# EAGLE board RX_Mini v43 (EAGLE 9.7.0)
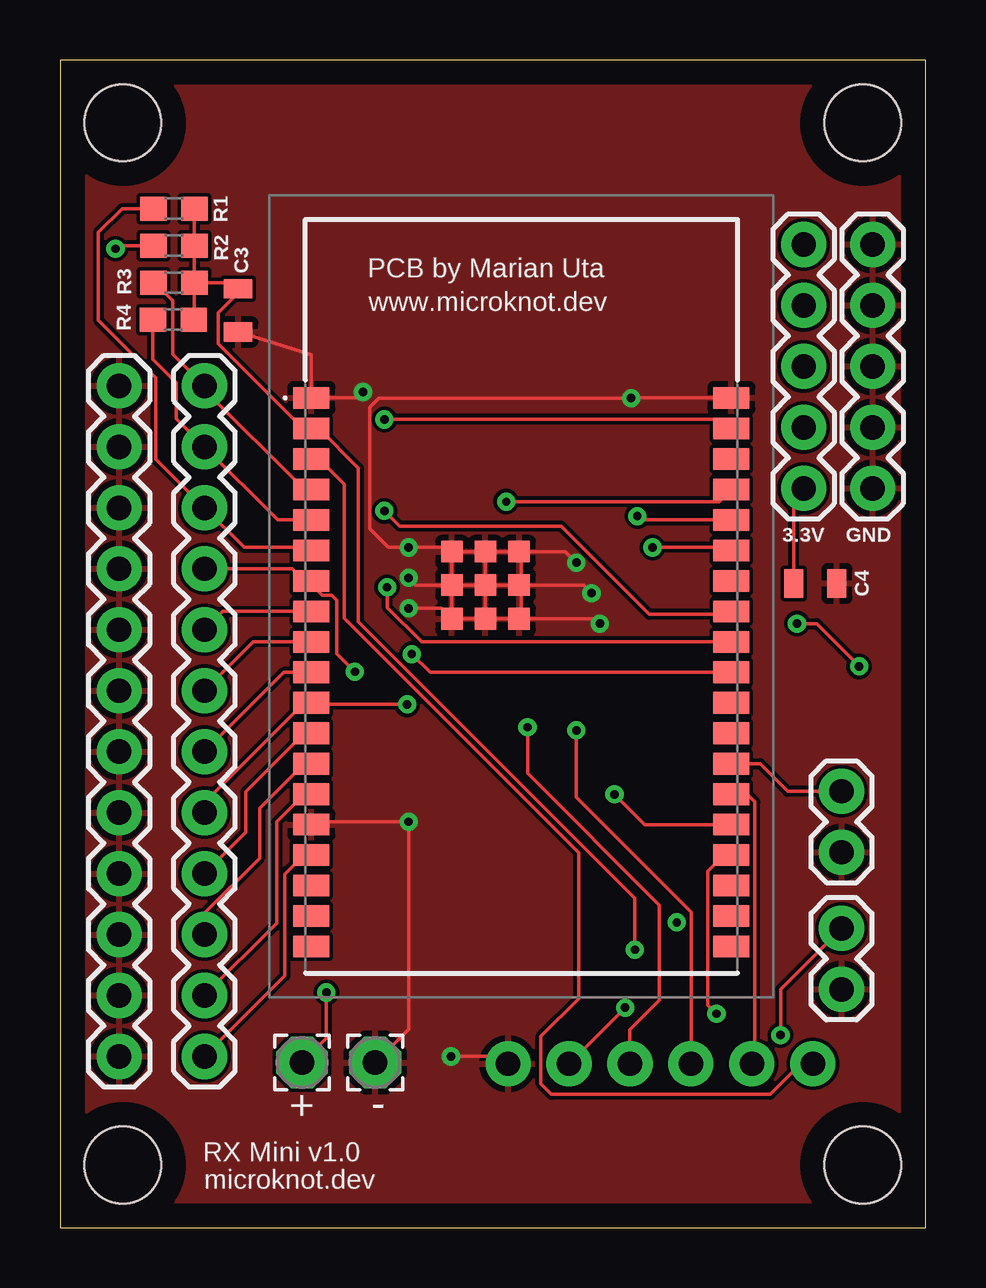
[diagram p0: board, top side]
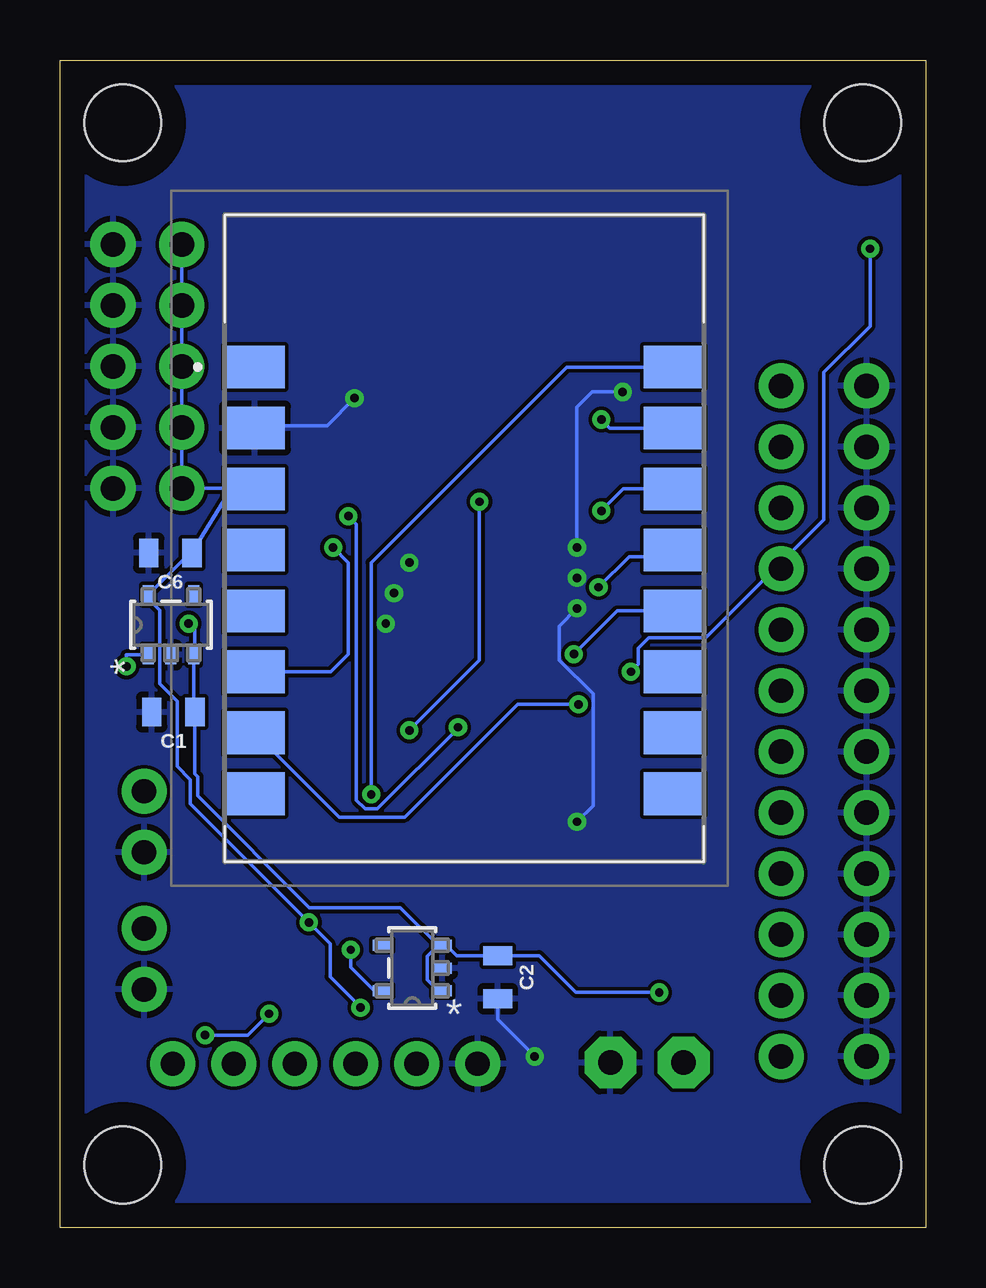
[diagram p1: board, bottom side, seen from below]

Size 36.07 x 48.66 mm. Coordinates in mm from the lower left corner, seen from the top.
Outline: 0,0 36.07,0 36.07,48.66 0,48.66 0,0
Copper layers (1*16): Top 0.035mm / dielectric 1.5mm / Bottom 0.035mm
Design rules "default": minimum track width 6mil, minimum drill 0.35mm, track to track 6mil, track to pad 6mil, pad to pad 6mil, via to via 6mil, smd to smd 6mil, copper to edge 40mil, drill to drill 6mil, minimum pad ring 10mil, minimum via ring 8mil, stop-mask expansion 4mil, vias tented up to drill 0mil, thermal gap 10mil
Holes 3.2 mm at 2.62,46.04 33.45,46.04 33.45,2.62 2.62,2.62

## Footprints (pad centres in the part's own frame; a part is rotated, then mirrored left to right if it is on the bottom)
1X05 = drill 1.016 pad 1.88: 1 0,0; 2 2.54,0; 3 5.08,0; 4 7.62,0; 5 10.16,0
2,15/1,0 = drill 1.016 pad 2.159 octagon: 1 0,0
0805 = smd 0.8 x 1.2: 1 -0.9,0; 2 0.9,0
LAMBDA80C24S = smd 2.5 x 1.78: 1 -8.725,7.135; 2 -8.725,4.595; 3 -8.725,2.055; 4 -8.725,-0.485; 5 -8.725,-3.025; 6 -8.725,-5.565; 7 -8.725,-8.105; 8 -8.725,-10.645; 9 8.725,-10.645; 10 8.725,-8.105; 11 8.725,-5.565; 12 8.725,-3.025; 13 8.725,-0.485; 14 8.725,2.055; 15 8.725,4.595; 16 8.725,7.135
ESP32WROVERIEN16R8 = smd 1.5 x 0.9: 1 -8.75,8.26; 2 -8.75,6.99; 3 -8.75,5.72; 4 -8.75,4.45; 5 -8.75,3.18; 6 -8.75,1.91; 7 -8.75,0.64; 8 -8.75,-0.63; 9 -8.75,-1.9; 10 -8.75,-3.17; 11 -8.75,-4.44; 12 -8.75,-5.71; 13 -8.75,-6.98; 14 -8.75,-8.25; 15 -8.75,-9.52; 16 -8.75,-10.79; 17 -8.75,-12.06; 18 -8.75,-13.33; 19 -8.75,-14.6; 20 8.75,-14.6; 21 8.75,-13.33; 22 8.75,-12.06; 23 8.75,-10.79; 24 8.75,-9.52; 25 8.75,-8.25; 26 8.75,-6.98; 27 8.75,-5.71; 28 8.75,-4.44; 29 8.75,-3.17; 30 8.75,-1.9; 31 8.75,-0.63; 32 8.75,0.64; 33 8.75,1.91; 34 8.75,3.18; 35 8.75,4.45; 36 8.75,5.72; 37 8.75,6.99; 38 8.75,8.26 | smd 0.9 x 0.9: 39 -1.5,0.46; 40 -1.5,1.86; 41 -2.9,1.86; 42 -2.9,0.46; 43 -2.9,-0.94; 44 -1.5,-0.94; 45 -0.1,-0.94; 46 -0.1,0.46; 47 -0.1,1.86
1X12 = drill 1.016 pad 1.88: 1 0,0; 2 2.54,0; 3 5.08,0; 4 7.62,0; 5 10.16,0; 6 12.7,0; 7 15.24,0; 8 17.78,0; 9 20.32,0; 10 22.86,0; 11 25.4,0; 12 27.94,0
1X06_NO_SILK = drill 1.016 pad 1.88: 1 0,0; 2 2.54,0; 3 5.08,0; 4 7.62,0; 5 10.16,0; 6 12.7,0
1X02 = drill 1.016 pad 1.88: 1 0,0; 2 2.54,0
0603 = smd 1.1 x 1: 1 -0.85,0; 2 0.85,0
SOT_RG1_DIO-L = smd 0.8 x 0.457: 1 -1.251,0.95; 2 -1.251,0; 3 -1.251,-0.95; 4 1.251,-0.95; 5 1.251,0.95

## Placement (x,y rotation side)
3.3V  [1X05]  30.99,30.81 90 top
+  [2,15/1,0]  10.08,6.88 0 top
-  [2,15/1,0]  13.13,6.88 0 top
C1  10uF  [0805]  31.34,21.49 180 bottom
C2  10uF  [0805]  17.83,10.44 270 bottom
C3  10uF  [0805]  7.42,38.23 90 top
C4  10uF  [0805]  31.47,26.85 0 top
C6  10uF  [0805]  31.47,28.12 180 bottom
GND  [1X05]  33.86,30.81 90 top
IC1  LAMBDA80C-24S  [LAMBDA80C24S]  19.23,28.73 0 bottom
IC4  ESP32-WROVER-IE-N16R8  [ESP32WROVERIEN16R8]  19.23,26.31 0 top
J1  [1X12]  2.46,7.14 90 top
J2  [1X06_NO_SILK]  18.67,6.83 0 top
J3  [1X12]  6.02,7.14 90 top
J4  [1X02]  32.56,12.47 270 top
J5  [1X02]  32.56,15.65 90 top
R1  0  [0603]  4.75,42.47 0 top
R2  0  [0603]  4.75,40.92 0 top
R3  0  [0603]  4.75,39.37 0 top
R4  0  [0603]  4.72,37.84 0 top
U1  [SOT_RG1_DIO-L]  21.39,10.82 180 bottom
U2  [SOT_RG1_DIO-L]  31.45,25.12 90 bottom

## Library data of the parts
3.3V GND J1-J5 = SparkFun-Connectors
+ - = wirepad
C1-C4 C6 = SparkFun-Capacitors; PROD_ID: CAP-11330
IC1 = LAMBDA80C-24S; ARROW_PART_NUMBER: LAMBDA80C-24S; ARROW_PRICE-STOCK: https://www.arrow.com/en/products/lambda80c-24s/rf-solutions; DESCRIPTION: RF Transceiver FSK 3.3V 16-Pin SMD Module; HEIGHT: 2mm; MANUFACTURER_NAME: RF SOLUTIONS; MANUFACTURER_PART_NUMBER: LAMBDA80C-24S; MOUSER_PART_NUMBER: 223-LAMBDA80C-24S; MOUSER_PRICE-STOCK: https://www.mouser.co.uk/ProductDetail/RF-Solutions/LAMBDA80C-24S?qs=17u8i%2FzlE89dhjIrlJ9FHg%3D%3D
IC4 = ESP32-Wrover-IE-N16R8; DESCRIPTION: RX TXRX MOD WIFI EXT IPEX SMD; HEIGHT: 3.45mm; MANUFACTURER_NAME: Espressif Systems; MANUFACTURER_PART_NUMBER: ESP32-Wrover-IE-N16R8; MOUSER_PART_NUMBER: 356-ESP32WRVIE2864UC; MOUSER_PRICE-STOCK: https://www.mouser.co.uk/ProductDetail/Espressif-Systems/ESP32-WROVER-IE-N16R8?qs=Li%252BoUPsLEnvfUqsrs3zskw%3D%3D
R1-R4 = SparkFun-Resistors; PROD_ID: RES-08609
U1 U2 = 2023-03-07_19-05-44_Library; COPYRIGHT: Copyright (C) 2023 Ultra Librarian. All rights reserved.; MANUFACTURER_PART_NUMBER: AP2112K-3.3TRG1; MFR_NAME: Diodes Inc

## Nets
3.3V: 3.3V.1 3.3V.2 3.3V.3 3.3V.4 3.3V.5 C4.1 C6.1 IC1.3 J2.2 U2.5
3.3V*: C3.2 IC4.2 R1.2 R2.2 R3.2 R4.2 U1.5
GND: -.1 C1.2 C2.2 C3.1 C4.2 C6.2 GND.1 GND.2 GND.3 GND.4 GND.5 IC1.2 IC4.1 IC4.15 IC4.38 IC4.39 IC4.40 IC4.41 IC4.42 IC4.43 IC4.44 IC4.45 IC4.46 IC4.47 J1.1 J1.2 J1.3 J1.4 J1.5 J1.6 J1.7 J1.8 J1.9 J1.10 J1.11 J1.12 J2.1 J4.2 J5.1 U1.2 U2.2
GPIO0: IC4.25 J2.5
GPIO2*: IC1.16 IC4.24
GPIO4: IC4.26 J5.2
GPIO5*: IC1.12 IC4.29
GPIO12(HMISO): IC4.14 J3.2
GPIO13(HMOSI): IC4.16 J3.1
GPIO14(HSCLK): IC4.13 J3.3
GPIO15: IC4.23 J4.1
GPIO18(SCLK): IC1.13 IC4.30
GPIO19(MISO): IC1.14 IC4.31
GPIO21*: IC1.6 IC4.33
GPIO22: IC4.36
GPIO23(MOSI): IC1.15 IC4.37
GPIO25: IC4.10 J3.6
GPIO26*: IC1.7 IC4.11 J3.5
GPIO27: IC4.12 J3.4
GPIO32: IC4.8 J3.8
GPIO33: IC4.9 J3.7
GPIO34: IC4.6 J3.10 R1.1
GPIO35: IC4.7 J3.9 R2.1
GPIO36: IC4.4 J3.12 R3.1
GPIO39: IC4.5 J3.11 R4.1
RST: IC4.3 J2.6
RXD: IC4.34 J2.3
TXD: IC4.35 J2.4
VIN: +.1 C1.1 C2.1 U1.1 U1.3 U2.1 U2.3

## Tracks (layer width: path | path; a pad name or v marks a point on that pad's centre or on a via)
3.3V  (via drill 0.35)
  Top 0.152: v23.55,9.17 J2.2 | C4.1 30.57,30.39 3.3V.1
  Bottom 0.152: v23.55,9.17 23.55,9.19 24.82,10.46 24.82,11.84 v25.7,12.73 30.63,17.66 30.63,18.67 31.19,19.23 31.19,21.93 31.92,22.67 31.92,25.73 32.39,26.2 U2.5 30.79,27.97 C6.1 28.94,30.78 IC1.3 27.98,30.81 3.3V.1 3.3V.2 3.3V.3 3.3V.4 3.3V.5
3.3V*  (via drill 0.35)
  Top 0.152: v23.95,11.58 23.95,13.72 12.43,25.24 12.43,31.65 10.78,33.3 IC4.2 10.12,33.3 6.59,36.83 6.59,38.13 7.42,38.96 C3.2 7.17,39.37 R3.2 | R1.2 R2.2 R3.2 | R3.2 5.6,37.86 R4.2
  Bottom 0.152: U1.5 22.98,9.87 23.95,10.85 v23.95,11.58
GND  (via drill 0.35)
  Top 0.152: IC4.15 10.6,16.92 v14.53,16.92 14.53,8.28 -.1 13.23,6.99 | 19.23,28.17 IC4.47 IC4.41 IC4.42 | 19.23,25.37 IC4.45 17.78,25.37 17.73,25.43 | IC4.43 15.9,25.81 v14.53,25.81 | IC4.42 14.83,26.77 v14.53,27.08 | v21.51,27.71 21.05,28.17 19.23,28.17 | v22.15,26.44 21.82,26.77 IC4.46 | IC4.38 v23.8,34.57 13.29,34.57 12.91,34.19 12.91,29.12 13.68,28.35 v14.53,28.35 16.18,28.35 | C3.1 10.48,36.37 IC4.1 12.37,34.57 v12.62,34.82 | IC4.42 16.43,26.77 | 16.43,26.77 IC4.39 | IC4.46 IC4.39 | IC4.39 17.73,25.43 | 17.73,25.43 IC4.44 IC4.43 | IC4.43 16.33,26.67 16.43,26.77 | IC4.39 IC4.40 | IC4.46 19.23,26.87 19.23,28.17 | IC4.46 19.23,26.67 19.23,25.37 | v22.49,25.17 22.29,25.37 19.23,25.37 | J2.1 18.36,7.14 v16.29,7.14
  Bottom 0.152: v14.53,25.81 15.26,25.07 15.26,23.65 13.86,22.25 13.86,17.59 v14.53,16.92 | v12.62,34.82 13.89,34.82 14.53,34.19 v14.53,28.35 | 27.86,33.43 24.94,33.43 v23.8,34.57 | C2.2 17.83,8.68 v16.29,7.14
  pour Top: 0.64,0.48 35.41,0.48 35.41,47.96 0.64,47.96
  pour Bottom: 0.64,0.48 35.41,0.48 35.41,47.96 0.64,47.96
GPIO0
  Top 0.152: IC4.25 28.63,18.06 28.96,17.74 28.96,6.96 J2.5
GPIO2*  (via drill 0.35)
  Top 0.152: v23.1,18.06 24.37,16.79 IC4.24
  Bottom 0.152: IC1.16 14.95,35.86 23.1,27.71 v23.1,18.06
GPIO4
  Top 0.152: IC4.26 29.17,19.33 30.31,18.19 J5.2
GPIO5*  (via drill 0.35)
  Top 0.152: IC4.29 15.42,23.14 v14.66,23.9
  Bottom 0.152: IC1.12 12.85,25.7 v14.66,23.9
GPIO12(HMISO)
  Top 0.152: 10.18,18.06 IC4.14 10.18,18.06 | 10.18,18.06 9.02,16.91 9.02,12.68 J3.2
GPIO13(HMOSI)
  Top 0.152: IC4.16 10.18,15.52 9.37,14.72 9.37,10.49 J3.1
GPIO14(HSCLK)
  Top 0.152: IC4.13 10.18,19.33 8.32,17.47 8.32,15.4 6.02,13.11 J3.3
GPIO15  (via drill 0.35)
  Top 0.152: v27.36,8.92 27,9.27 27,14.85 27.68,15.52 IC4.23 | J4.1 30.02,9.93 v30.02,8.03
  Bottom 0.152: v30.02,8.03 28.24,8.03 v27.36,8.92
GPIO18(SCLK)  (via drill 0.35)
  Top 0.152: v13.63,26.69 13.64,26.68 13.64,25.84 15.06,24.41 IC4.30
  Bottom 0.152: IC1.13 10.78,27.97 12.35,27.97 v13.63,26.69
GPIO19(MISO)  (via drill 0.35)
  Top 0.152: IC4.31 27.85,25.55 24.56,25.55 20.88,29.24 14.15,29.24 v13.51,29.87
  Bottom 0.152: IC1.14 12.6,30.78 v13.51,29.87
GPIO21*  (via drill 0.35)
  Top 0.152: IC4.33 27.86,28.35 v24.69,28.35
  Bottom 0.152: IC1.6 24.79,23.16 24.05,23.9 24.05,27.71 v24.69,28.35
GPIO23(MOSI)  (via drill 0.35)
  Top 0.152: IC4.37 27.98,33.38 27.67,33.68 v13.51,33.68
  Bottom 0.152: IC1.15 13.15,33.32 v13.51,33.68
GPIO25
  Top 0.152: J3.6 9.33,23.14 IC4.10
GPIO26*  (via drill 0.35)
  Top 0.152: v14.47,21.81 10.55,21.81 IC4.11 | IC4.11 10.18,21.87 | IC4.11 10.18,21.87 | 10.18,21.87 6.02,17.72 J3.5
  Bottom 0.152: IC1.7 24.44,17.11 21.7,17.11 17,21.81 v14.47,21.81
GPIO27
  Top 0.152: 10.18,20.6 IC4.12 10.18,20.6 | 10.18,20.6 7.74,18.17 7.74,16.48 J3.4
GPIO32
  Top 0.152: IC4.8 6.79,25.68 J3.8
GPIO33
  Top 0.152: IC4.9 8.06,24.41 J3.7
GPIO34
  Top 0.152: IC4.6 10.36,28.35 7.67,28.35 J3.10 3.99,32.03 3.99,35.43 1.6,37.82 1.6,41.47 2.59,42.47 R1.1
GPIO35  (via drill 0.35)
  Top 0.152: IC4.7 10.33,26.95 | 10.33,26.95 10.18,26.95 9.67,27.46 J3.9 | 10.33,26.95 10.92,26.36 11.32,26.36 11.53,26.15 11.53,23.92 v12.28,23.17 | R2.1 2.44,40.92 v2.31,40.79
  Bottom 0.152: v12.28,23.17 11.98,23.47 11.98,24.15 11.54,24.58 9.16,24.58 4.24,29.5 4.24,35.64 2.31,37.57 v2.31,40.79
GPIO36
  Top 0.152: IC4.4 10.18,30.76 6.02,34.92 J3.12 4.7,36.39 4.7,38.62 3.95,39.37 R3.1
GPIO39
  Top 0.152: IC4.5 9.06,29.49 J3.11 4.85,33.71 4.85,35.21 3.87,36.19 R4.1
RST
  Top 0.152: IC4.3 10.78,32.03 11.84,30.97 11.84,25.4 21.62,15.62 21.62,9.55 20.04,7.98 20.04,5.99 20.47,5.56 29.59,5.56 30.86,6.83 J2.6
RXD  (via drill 0.35)
  Top 0.152: v19.48,20.85 19.48,18.93 24.97,13.45 24.97,9.47 23.75,8.26 J2.3 | IC4.34 24.21,29.49 v24.05,29.65
  Bottom 0.152: v19.48,20.85 19.48,20.82 22.85,17.45 23.35,17.45 23.72,17.82 23.72,29.32 v24.05,29.65
TXD  (via drill 0.35)
  Top 0.152: v21.51,20.73 21.51,17.93 26.31,13.14 26.31,6.85 J2.4 | IC4.35 27.47,30.26 v18.6,30.26 v18.59,30.25
  Bottom 0.152: v18.59,30.25 18.59,23.65 v21.51,20.73
VIN  (via drill 0.35)
  Top 0.152: v11.1,9.8 11.1,7.9 +.1 | v33.3,23.39 31.52,25.17 v30.71,25.17
  Bottom 0.152: 20.31,11.77 21.88,13.34 25.68,13.34 30.33,17.99 30.33,18.8 30.44,18.91 C1.1 30.49,21.54 U2.3 30.45,23.91 30.45,24.92 v30.71,25.17 | v11.1,9.8 14.57,9.8 16.11,11.34 C2.1 19.53,11.34 19.96,11.77 U1.3 20.31,11.77 | 20.31,11.77 20.76,11.31 20.76,10.33 20.31,9.87 U1.1 | v33.3,23.39 33.31,23.4 33.31,23.87 U2.1

## Text on the board
tNames: PCB by Marian Uta | www.microknot.dev | RX Mini v1.0 | microknot.dev